# Altium PCB STM32-geiger.PcbDoc
Units mm, origin at the board's own origin, x right, y up, seen from the top; angles counter-clockwise.
Board outline 90 x 70 mm, 2 copper layers (Top Layer, Bottom Layer); 119 components, 85 nets, 345 pads, 48 vias.
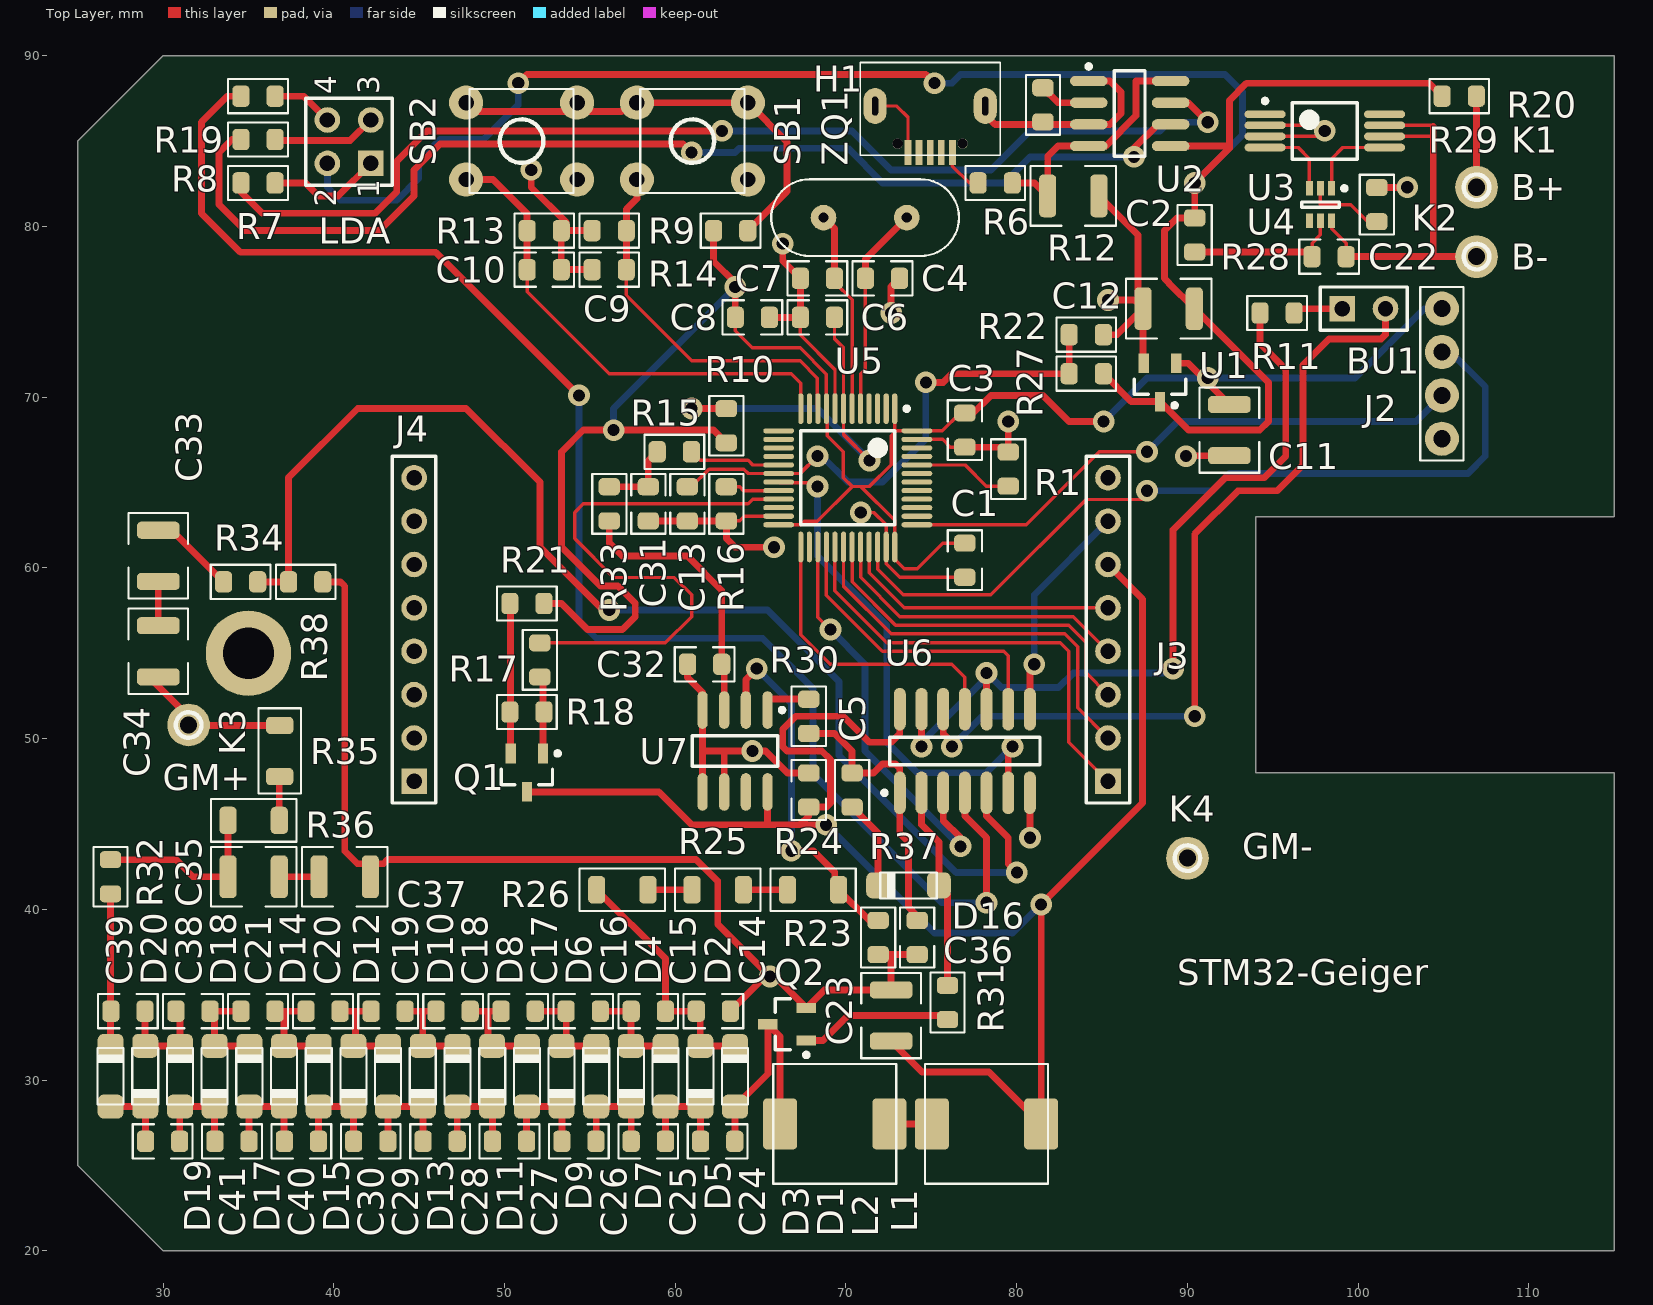
[diagram p0: Top Layer view]
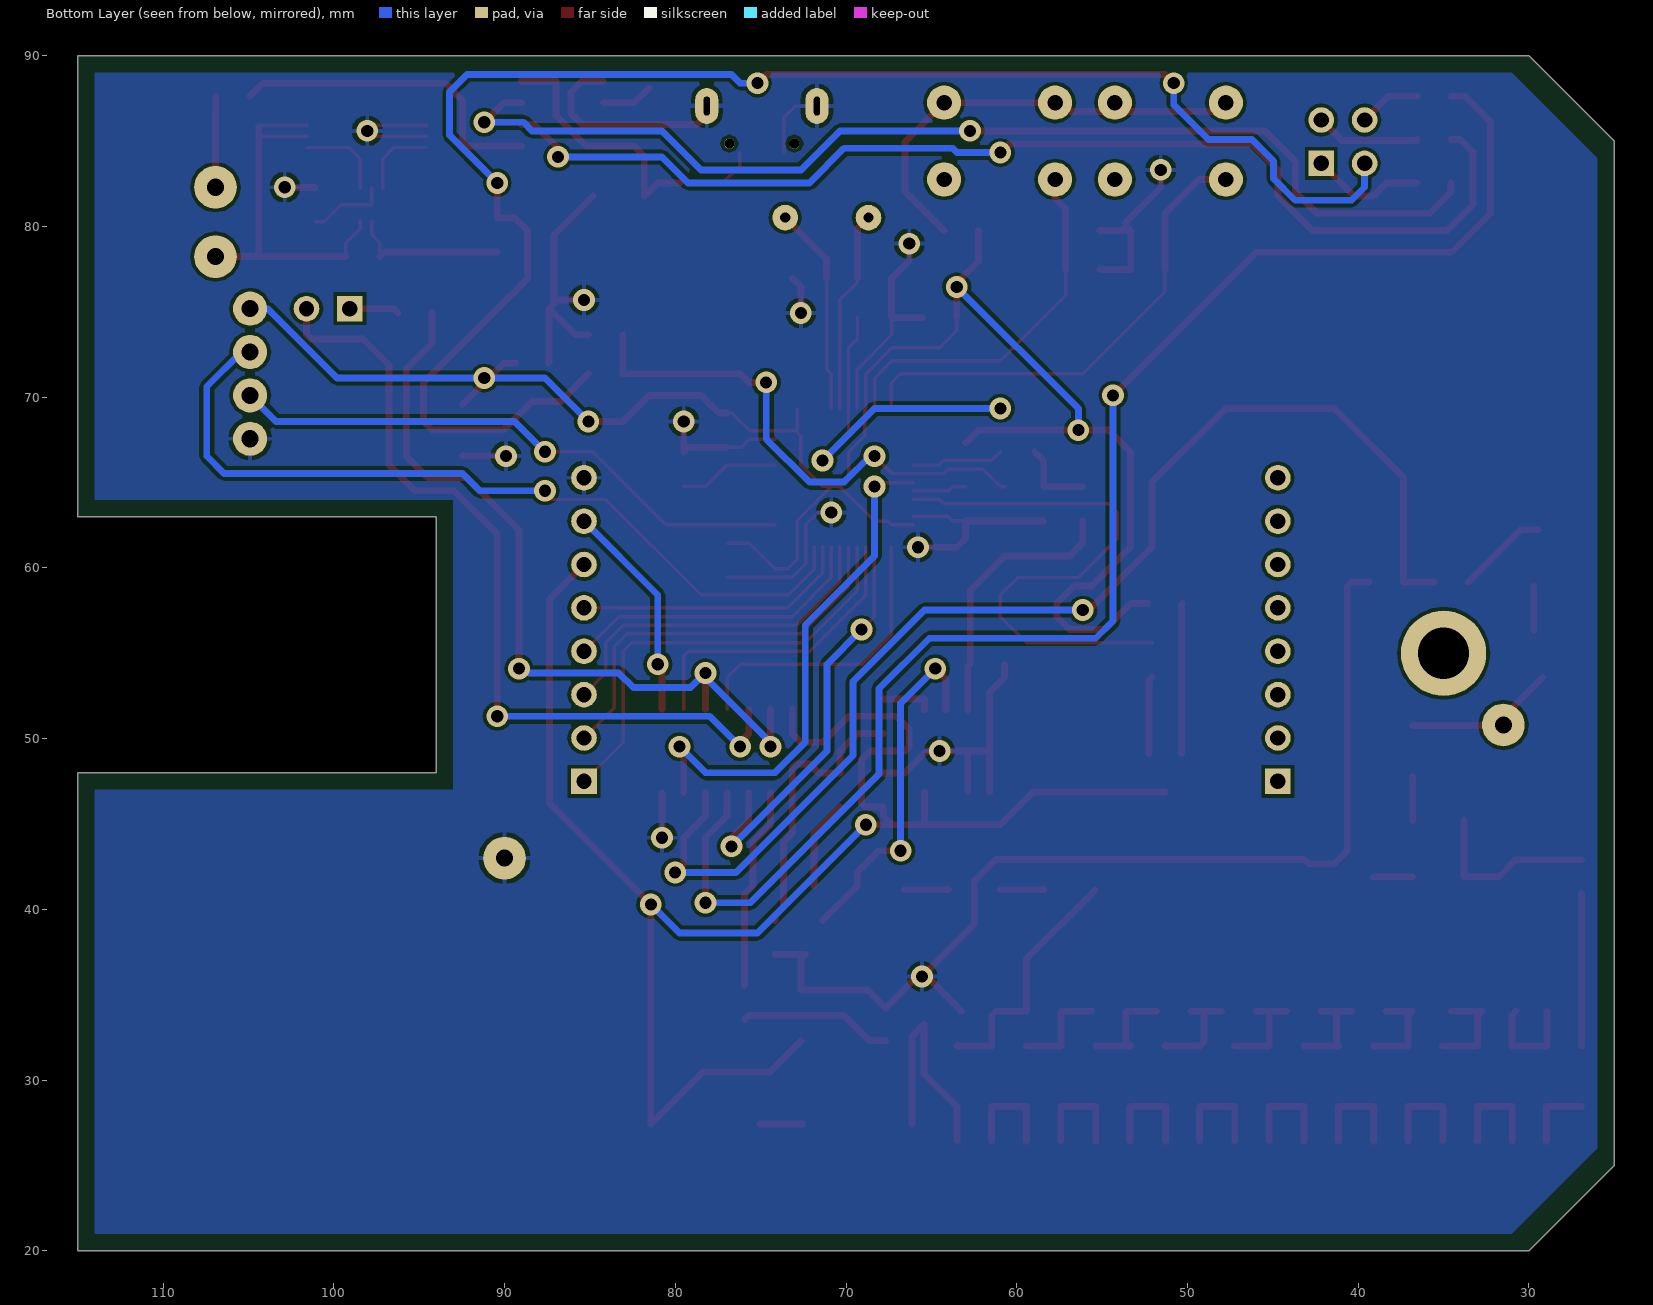
[diagram p1: Bottom Layer view, seen from below]
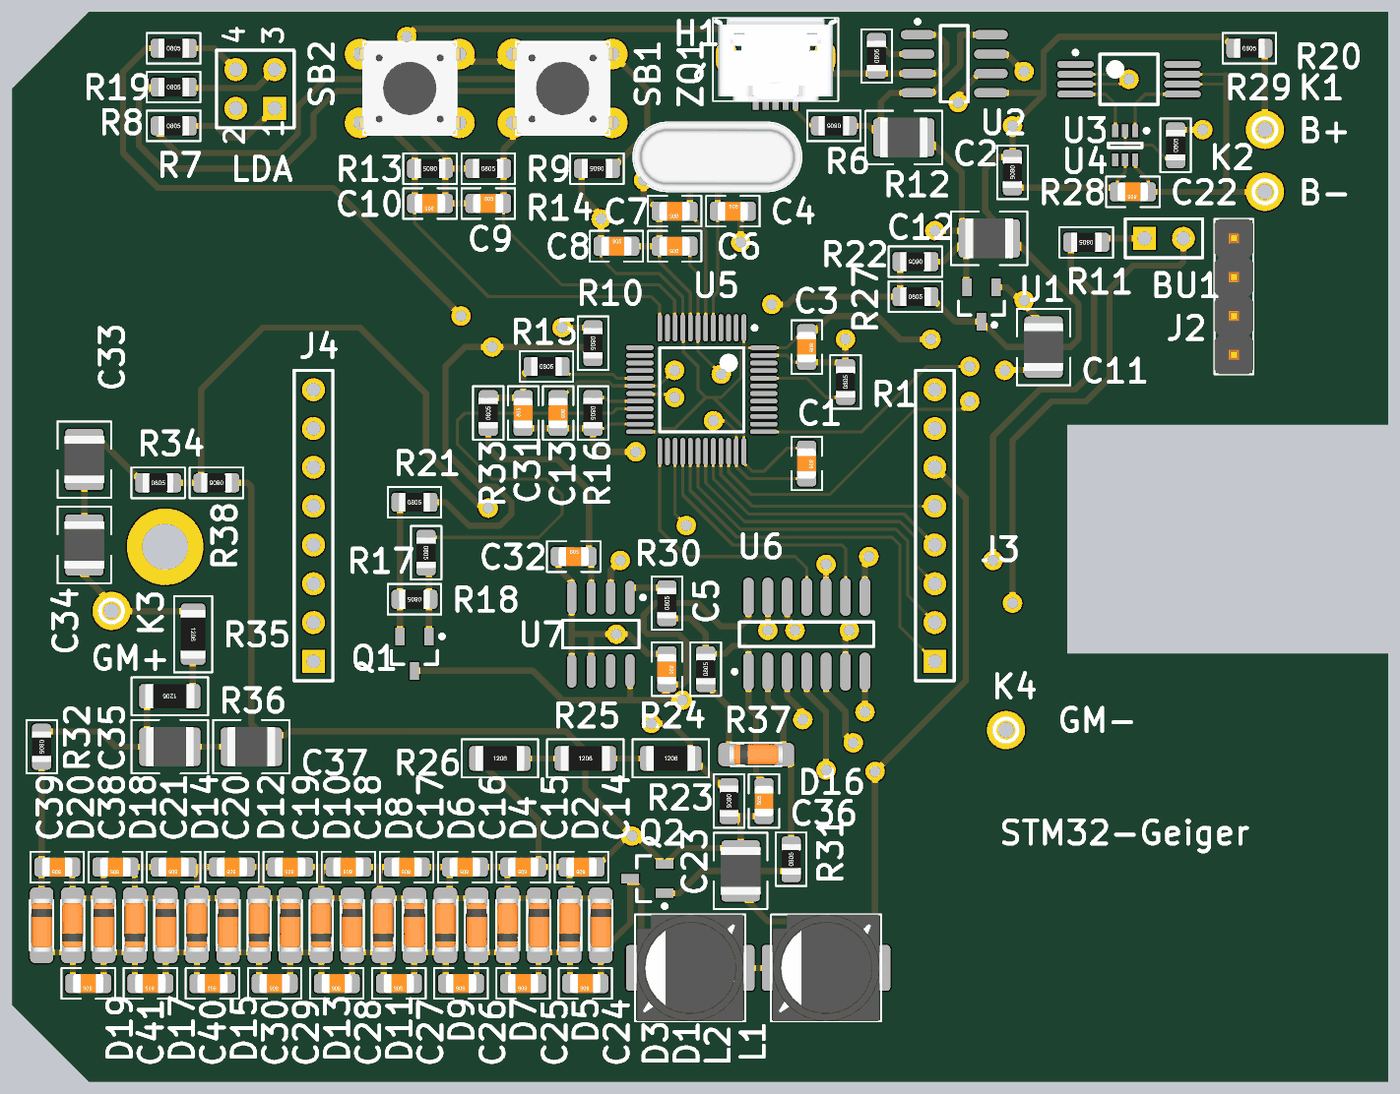
[diagram p2: 3D render of the assembled board from above, using the file's embedded part models]

## Layer stack, top to bottom
Top Solder: solder mask 0.0102, Solder Resist, Dk 3.5
Top Layer: signal copper 0.0356
Dielectric 1: dielectric 0.32, FR-4, Dk 4.8
Bottom Layer: signal copper 0.0356
Bottom Solder: solder mask 0.0102, Solder Resist, Dk 3.5

## Board outline
30,20 25,25 25,85 30,90 115,90 115,63 94,63 94,48 115,48 115,20 30,20

## Design rules (kind name [scope] priority, off if disabled: settings)
Clearance [All] p1: gap=0.2
PolygonConnect [All] p1: connectstyle=Relief reliefconductorwidth=0.254 reliefentries=4 polygonreliefangle="90 Angle" airgapwidth=0.254
RoutingVias [All] p1: holewidth=0.711 width=1.27 viastyle="Through Hole" minholewidth=0.711 minwidth=1.27 maxholewidth=0.711 maxwidth=1.27
SolderMaskExpansion [All] p1: expansion=0.102
Width [All] p1: maxlimit=1 minlimit=0.18 preferedwidth=0.4
30 further rules are at their usual default settings.

## Components (designator, comment, footprint, x,y, rotation, side; value= is the part's Value field where it differs from the comment)
BU1 "piezo" HDR1X2 99.06,75.184 r0 top
C1 "100n" C0805(2013) 76.962,60.452 r270 top
C2 "10u" C1210(3225) 83.312,81.788 r0 top
C3 "1.0" C0805(2013) 76.962,68.072 r270 top
C4 "15" C0805(2013) 72.136,76.962 r0 top
C5 "100n" C0805(2013) 67.818,46.99 r270 top
C6 "100n" C0805(2013) 68.326,74.676 r180 top
C7 "15" C0805(2013) 68.326,76.962 r180 top
C8 "100n" C0805(2013) 64.516,74.676 r0 top
C9 "100n" C0805(2013) 56.134,77.47 r0 top
C10 "100n" C0805(2013) 52.324,77.47 r180 top
C11 "10u" C1210(3225) 92.456,68.072 r270 top
C12 "10u" C1210(3225) 88.9,75.184 r180 top
C13 "1.0" C0805(2013) 60.706,63.754 r270 top
C14 "100n" C0805(2013) 62.23,34.036 r180 top
C15 "100n" C0805(2013) 58.42,34.036 r180 top
C16 "100n" C0805(2013) 54.61,34.036 r180 top
C17 "100n" C0805(2013) 50.8,34.036 r180 top
C18 "100n" C0805(2013) 46.99,34.036 r180 top
C19 "100n" C0805(2013) 43.18,34.036 r180 top
C20 "100n" C0805(2013) 39.37,34.036 r180 top
C21 "100n" C0805(2013) 35.56,34.036 r180 top
C22 "100n" C0805(2013) 98.298,78.232 r180 top
C23 "10u" C1210(3225) 72.644,33.782 r90 top
C24 "100n" C0805(2013) 62.484,26.416 r180 top
C25 "100n" C0805(2013) 58.42,26.416 r180 top
C26 "100n" C0805(2013) 54.356,26.416 r180 top
C27 "100n" C0805(2013) 50.292,26.416 r180 top
C28 "100n" C0805(2013) 46.228,26.416 r180 top
C29 "100n" C0805(2013) 42.164,26.416 r180 top
C30 "100n" C0805(2013) 38.1,26.416 r180 top
C31 "1.0" C0805(2013) 58.42,63.754 r90 top
C32 "1.0" C0805(2013) 61.722,54.356 r0 top
C33 "22" C1210(3225) 29.718,60.706 r270 top
C34 "22" C1210(3225) 29.718,55.118 r270 top
C35 "10nF" C1210(3225) 35.306,41.91 r0 top
C36 "100" C0805(2013) 74.168,38.354 r90 top
C37 "10nF" C1210(3225) 40.64,41.91 r0 top
C38 "100n" C0805(2013) 31.75,34.036 r180 top
C39 "100n" C0805(2013) 27.94,34.036 r180 top
C40 "100n" C0805(2013) 34.036,26.416 r180 top
C41 "100n" C0805(2013) 29.972,26.416 r180 top
D1 "LL4148" SOD80/MLL34 63.5,30.226 r90 top
D2 "LL4148" SOD80/MLL34 61.468,30.226 r270 top
D3 "LL4148" SOD80/MLL34 59.436,30.226 r90 top
D4 "LL4148" SOD80/MLL34 57.404,30.226 r270 top
D5 "LL4148" SOD80/MLL34 55.372,30.226 r90 top
D6 "LL4148" SOD80/MLL34 53.34,30.226 r270 top
D7 "LL4148" SOD80/MLL34 51.308,30.226 r90 top
D8 "LL4148" SOD80/MLL34 49.276,30.226 r270 top
D9 "LL4148" SOD80/MLL34 47.244,30.226 r90 top
D10 "LL4148" SOD80/MLL34 45.212,30.226 r270 top
D11 "LL4148" SOD80/MLL34 43.18,30.226 r90 top
D12 "LL4148" SOD80/MLL34 41.148,30.226 r270 top
D13 "LL4148" SOD80/MLL34 39.116,30.226 r90 top
D14 "LL4148" SOD80/MLL34 37.084,30.226 r270 top
D15 "LL4148" SOD80/MLL34 35.052,30.226 r90 top
D16 "LL4148" SOD80/MLL34 73.66,41.402 r180 top
D17 "LL4148" SOD80/MLL34 33.02,30.226 r270 top
D18 "LL4148" SOD80/MLL34 30.988,30.226 r90 top
D19 "LL4148" SOD80/MLL34 28.956,30.226 r270 top
D20 "LL4148" SOD80/MLL34 26.924,30.226 r90 top
H1 "USB Micro" "USB Micro" 74.93,84.328 r0 top
J2 "H-1x4" J1x4 104.902,71.374 r90 top
J3 "" HDR1X8 85.344,47.498 r90 top
J4 "" HDR1X8 44.704,47.498 r90 top
K1 "Battery +" F1-2.5 106.934,82.296 r0 top
K2 "Battery -" F1-2.5 106.934,78.232 r0 top
K3 "GM+" F1-2.5 31.496,50.8 r0 top
K4 "GM-" F1-2.5 90,43 r0 top
L1 "4.7uH" Dr-SD-75 78.232,27.432 r90 top
L2 "4.7uH" Dr-SD-75 69.342,27.432 r90 top
LDA "Header 2X2" HDR2X2 42.164,83.693 r90 top
Q1 "IRLML6402" Micro3_N 51.308,48.006 r270 top
Q2 "IRLML0100" SOT-23_N 66.548,33.274 r180 top
R1 "10k" R0805 79.502,65.786 r90 top
R6 "0.33 Ohm" R0805 78.74,82.55 r180 top
R7 "220" R0805 35.56,82.55 r0 top
R8 "220" R0805 35.56,85.09 r0 top
R9 "220" R0805 63.246,79.756 r180 top
R10 "10k" R0805 62.992,68.326 r270 top
R11 "220" R0805 95.25,74.93 r180 top
R12 "4.7k" R0805 81.534,87.122 r90 top
R13 "10k" R0805 52.324,79.756 r180 top
R14 "10k" R0805 56.134,79.756 r0 top
R15 "22k" R0805 59.944,66.802 r0 top
R16 "10k" R0805 62.992,63.754 r270 top
R17 "220" R0805 52.07,54.61 r270 top
R18 "91k" R0805 51.308,51.562 r180 top
R19 "220" R0805 35.56,87.63 r0 top
R20 "0" R0805 105.918,87.63 r0 top
R21 "10" R0805 51.308,57.912 r0 top
R22 "1M" R0805 84.074,73.66 r180 top
R23 "91k" R0805 71.882,38.354 r270 top
R24 "10M" R1206 68.072,41.148 r0 top
R25 "10M" R1206 62.484,41.148 r0 top
R26 "10M" R1206 56.896,41.148 r0 top
R27 "1M" R0805 84.074,71.374 r0 top
R28 "220" R0805 90.424,79.502 r270 top
R29 "1k" R0805 101.092,81.28 r90 top
R30 "47k" R0805 67.818,51.308 r90 top
R31 "10" R0805 75.946,34.544 r90 top
R32 "91k" R0805 26.924,41.91 r270 top
R33 "22k" R0805 56.134,63.754 r90 top
R34 "91k" R0805 34.544,59.182 r0 top
R35 "2.2M" R1206 36.83,49.276 r270 top
R36 "2.2M" R1206 35.306,45.212 r180 top
R37 "10k" R0805 70.358,46.99 r90 top
R38 "1M" R0805 38.354,59.182 r180 top
SB1 "Backlight/Ticks" TS-06 51,85 r270 top
SB2 "Power/Reset" TS-06 61,85 r270 top
U1 "XC6206P332" SOT23_N 88.392,70.866 r270 top
U2 "TP4056" 751-06_N 86.614,86.614 r0 top
U3 "FS8205A" SOP65P780-8M 98.044,85.598 r0 top
U4 "DW01A" SOT363-6N 97.79,81.28 r270 top
U5 "STM32F103C8T6TR" STM-LQFP48_N 70.104,65.278 r270 top
U6 "MC74HC14AD" 751A-02_M 76.962,49.276 r90 top
U7 "LM393D" 751-02_N 63.5,49.276 r270 top
ZQ1 "8MHz" HC49S 71.12,80.518 r0 top

## Footprints (in the part's own frame and the unit in brackets; to place one, negate y for a bottom-side part, rotate by r counter-clockwise, add the part's x,y. Pads: shape width x height; smd on the part's side, far side on the other; paste and mask are expansions set on the pad)
751-02_N [mm] "SOIC, 8-Leads, Body 4.9x3.9mm, Pitch 1.27mm, IPC Medium Density"
  oval 2.2x0.6 smd: 1(-2.4,1.905) 2(-2.4,0.635) 3(-2.4,-0.635) 4(-2.4,-1.905) 5(2.4,-1.905) 6(2.4,-0.635) 7(2.4,0.635) 8(2.4,1.905)
  silkscreen extent -2.52,-2.5 0.9,2.88, body extent -1.95,-2.45 1.95,2.45, height 1.75
751-06_N [mm] "SOIC, 8-Leads, Body 4.9x3.9mm, Pitch 1.27mm, IPC Medium Density"
  oval 2.2x0.6 smd: 1(-2.4,1.905) 2(-2.4,0.635) 3(-2.4,-0.635) 4(-2.4,-1.905) 5(2.4,-1.905) 6(2.4,-0.635) 7(2.4,0.635) 8(2.4,1.905)
  silkscreen extent -2.52,-2.5 0.9,2.88, body extent -1.95,-2.45 1.95,2.45, height 1.75
751A-02_M [mm] "SOIC, 14-Leads, Body 8.7x3.9mm, Pitch 1.27mm, IPC Low Density"
  oval 2.5x0.7 smd: 1(-2.45,3.81) 2(-2.45,2.54) 3(-2.45,1.27) 4(-2.45,0) 5(-2.45,-1.27) 6(-2.45,-2.54) 7(-2.45,-3.81) 8(2.45,-3.81) 9(2.45,-2.54) 10(2.45,-1.27) 11(2.45,0) 12(2.45,1.27) 13(2.45,2.54) 14(2.45,3.81)
  silkscreen extent -2.57,-4.4 0.8,4.83, body extent -2,-4.38 2,4.38, height 1.75
C0805(2013) [mm]
  rrect50% 1x1.25 smd: 1(-1,0) 2(1,0)
  silkscreen extent -1.75,-1 1.75,1, body extent -1,-0.62 1,0.63, height 0.73
C1210(3225) [mm]
  rrect50% 1x2.5 smd: 1(-1.5,0) 2(1.5,0)
  silkscreen extent -2.5,-1.75 2.5,1.75, body extent -1.55,-1.3 1.55,1.3, height 0.47
Dr-SD-75 [mm] "7.3x7.3x5mm"
  rrect25% 3x2 smd: 1(0,-3.2) 2(0,3.2)
  silkscreen extent -3.5,-3.6 3.5,3.6, body extent -3.5,-3.6 3.5,3.6, height 4.51
F1-2.5 [mm]
  round 2.5 hole 1: 1(0,0)
  silkscreen extent -0.75,-0.75 0.75,0.75
HC49S [mm]
  round 1.5 hole 0.6: 1(-2.44,0) 2(2.44,0)
  silkscreen extent -5.5,-2.25 5.5,2.25, body extent -5.5,-2.25 5.5,2.25, height 3.7
HDR1X2 [mm] "Connector; Header; 2 Position"
  rect 1.5x1.5 hole 0.9: 1(0,0)
  round 1.5 hole 0.9: 2(2.54,0)
  silkscreen extent -1.27,-1.27 3.81,1.27
HDR1X8 [mm] "Connector; Header; 8 Position"
  rect 1.5x1.5 hole 0.9: 1(0,0)
  round 1.5 hole 0.9: 2(2.54,0) 3(5.08,0) 4(7.62,0) 5(10.16,0) 6(12.7,0) 7(15.24,0) 8(17.78,0)
  silkscreen extent -1.27,-1.27 19.05,1.27
HDR2X2 [mm] "Connector; Header; 2x2 Position"
  rect 1.5x1.5 hole 0.9: 1(0,0)
  round 1.5 hole 0.9: 2(0,2.54) 3(2.54,0) 4(2.54,2.54)
  silkscreen extent -1.27,-1.27 3.81,3.81
J1x4 [mm]
  round 2 hole 1: 1(-3.81,0) 2(-1.27,0) 3(1.27,0) 4(3.81,0)
  silkscreen extent -5.08,-1.27 5.08,1.27, body extent -5.08,-1.27 5.08,1.27, height 10.1
Micro3_N [mm] "SOT23, 3-Leads, Body 2.9x1.3mm, Pitch 0.95mm, Lead Span 2.3mm, IPC Medium Density"
  rect 1.15x0.6 smd: 1(-1.125,0.95) 2(-1.125,-0.95) 3(1.125,0)
  silkscreen extent -1.25,-1.5 0.7,1.93, body extent -0.7,-1.5 0.7,1.5, height 1.12
R0805 [mm]
  rrect50% 1x1.25 smd: 1(-1,0) 2(1,0)
  silkscreen extent -1.75,-1 1.75,1, body extent -1,-0.62 1,0.63, height 0.6
R1206 [mm]
  rrect50% 1x1.6 smd: 1(-1.5,0) 2(1.5,0)
  silkscreen extent -2.5,-1.25 2.5,1.25, body extent -1.6,-0.8 1.6,0.8, height 0.6
SOD80/MLL34 [mil]
  rrect50% 55x60 smd: 1(-70,0) 2(70,0)
  silkscreen extent -65,-30 65,30, body extent -69,-28 69,27, height 55
SOP65P780-8M [mm] "SOP, 8-Leads, Body 3x5.3mm, Pitch 0.65mm, IPC Low Density"
  oval 2.4x0.45 smd: 1(-3.5,0.975) 2(-3.5,0.325) 3(-3.5,-0.325) 4(-3.5,-0.975) 5(3.5,-0.975) 6(3.5,-0.325) 7(3.5,0.325) 8(3.5,0.975)
  silkscreen extent -3.62,-1.65 1.9,1.87, body extent -2.8,-1.65 2.8,1.65, height 2
SOT23_N [mm] "SOT23, 3-Leads, Body 2.9x1.3mm, Pitch 0.95mm, Lead Span 2.3mm - Reverse Pinning, IPC Medium Density"
  rect 1.15x0.6 smd: 1(1.125,0) 2(-1.125,-0.95) 3(-1.125,0.95)
  silkscreen extent -0.2,-1.5 1.47,1.5, body extent -0.7,-1.5 0.7,1.5, height 1.1
SOT363-6N [mm] "SOT363, 6-Leads, Body 2x1.3mm, Pitch 0.65mm, Lead Span 2.1mm, IPC Medium Density"
  rect 0.85x0.4 smd: 1(-0.95,0.65) 2(-0.95,0) 3(-0.95,-0.65) 4(0.95,-0.65) 5(0.95,0) 6(0.95,0.65)
  silkscreen extent -1.07,-1.1 0.15,1.53, body extent -0.7,-1.1 0.7,1.1, height 1
SOT-23_N [mm] "SOT23, 3-Leads, Body 2.9x1.3mm, Pitch 0.95mm, Lead Span 2.3mm, IPC Medium Density"
  rect 1.15x0.6 smd: 1(-1.125,0.95) 2(-1.125,-0.95) 3(1.125,0)
  silkscreen extent -1.25,-1.5 0.7,1.92, body extent -0.7,-1.5 0.7,1.5, height 1.11
STM-LQFP48_N [mm] "QFP, 48-Leads, Body 7x7mm, Pitch 0.5mm, IPC Medium Density"
  oval 1.8x0.3 smd: 1(-4.05,2.75) 2(-4.05,2.25) 3(-4.05,1.75) 4(-4.05,1.25) 5(-4.05,0.75) 6(-4.05,0.25) 7(-4.05,-0.25) 8(-4.05,-0.75) 9(-4.05,-1.25) 10(-4.05,-1.75) 11(-4.05,-2.25) 12(-4.05,-2.75) 25(4.05,-2.75) 26(4.05,-2.25) 27(4.05,-1.75) 28(4.05,-1.25) 29(4.05,-0.75) 30(4.05,-0.25) 31(4.05,0.25) 32(4.05,0.75) 33(4.05,1.25) 34(4.05,1.75) 35(4.05,2.25) 36(4.05,2.75)
  oval 0.3x1.8 smd: 13(-2.75,-4.05) 14(-2.25,-4.05) 15(-1.75,-4.05) 16(-1.25,-4.05) 17(-0.75,-4.05) 18(-0.25,-4.05) 19(0.25,-4.05) 20(0.75,-4.05) 21(1.25,-4.05) 22(1.75,-4.05) 23(2.25,-4.05) 24(2.75,-4.05) 37(2.75,4.05) 38(2.25,4.05) 39(1.75,4.05) 40(1.25,4.05) 41(0.75,4.05) 42(0.25,4.05) 43(-0.25,4.05) 44(-0.75,4.05) 45(-1.25,4.05) 46(-1.75,4.05) 47(-2.25,4.05) 48(-2.75,4.05)
  silkscreen extent -4.17,-2.75 2.75,3.58, body extent -3.5,-3.5 3.5,3.5, height 1.6
TS-06 [mm]
  round 2 hole 0.9: 1(-2.25,3.25) 1(-2.25,-3.25) 2(2.25,3.25) 2(2.25,-3.25)
  silkscreen extent -3.05,-3.05 3.05,3.05, body extent -3,-3.3 3,3.3, height 3.95
"USB Micro" [mm]
  rrect100% 1.35x2.1 hole 0.35 slot 1.1 at 90 deg: 0(-3.225,2.725) 0(3.225,2.725)
  rect 0.4x1.45 smd: 1(1.3,0) 2(0.65,0) 3(0,0) 4(-0.65,0) 5(-1.3,0)
  round 0.6 hole 0.6 unplated: A(-1.9,0.525) A(1.9,0.525)
  silkscreen extent -4.1,-0.15 4.1,5.28, body extent -4.1,-0.15 4.1,5.28, height 2.68

## Part data
BU1: library part "Header 2", "Header, 2-Pin"
C1 C3 C4 C5 C6 C7 C8 C9 C10 C13 C14 C15 C16 C17 C18 C19 C20 C21 C22 C24 C25 C26 C27 C28 C29 C30 C31 C32 C36 C38 C39 C40 C41: library part C-0805, "SMD-0805"
C2 C11 C12 C23 C33 C34 C35 C37: library part "C-1210  100V 2.2u", "SMD-1210 100V X7R 10%"
D1 D2 D3 D4 D5 D6 D7 D8 D9 D10 D11 D12 D13 D14 D15 D16 D17 D18 D19 D20: "75V 0.3A SOD80/MLL34"
H1: "USB B Micro R/A SMD"
J3 J4: library part "Header 8", "Header, 8-Pin"
K1 K2 K3 K4: library part K-1-2.5
L1 L2: library part "L-SD-75 33uH", "1.2A 0.15om 7.3x7.3x5mm"
LDA: "Header, 2-Pin, Dual row"
Q1: library part IRLML6401, "HEXFET Power MOSFET"
Q2: library part IRLML2402, "HEXFET Power MOSFET"
R1 R6 R7 R8 R9 R10 R11 R12 R13 R14 R15 R16 R17 R18 R19 R20 R21 R22 R23 R27 R28 R29 R30 R31 R32 R33 R34 R37 R38: library part R-0805, "SMD 0805 0.1W 5% 150V"
R24 R25 R26 R35 R36: library part R-1206, "SMD 1206 0.125W 5% 200V"
SB1 SB2: library part "Buton TS-06"
U1: library part "Volt Reg", "Voltage Regulator"
U2 U3: library part MP2307
U4: library part "Header 6", "Header, 6-Pin"
U5: "ARM Cortex-M3 32-bit MCU, 64 KB Flash, 20 KB Internal RAM, 37 I/Os, 48-pin LQFP, -40 to 85 degC, Tape and Reel"
U6: "Hex Schmitt Trigger Inverter"
U7: "Dual Comparator"
ZQ1: library part Q

## Free pads (board coordinates)
  round 5 hole 3: 0(35,55)

## Via types
v1: diameter 1.27, hole 0.711, Top Layer to Bottom Layer, 48 vias

## Nets (pads, with @x,y where several pads share a name; then routed paths per layer and width w, separated by ;. In a path a pad name is that pad's centre, name@x,y a point inside that pad or via, vN(x,y) a via of type N, cw(c..) or ccw(c..) an arc to the next point about the centre after c; other vN are vias at no path point)
GND: C1.2 C2.2 C3.2 C4.2 C5.1 C6.2 C7.2 C8.2 C9.1 C10.1 C11.2 C12.2 C13.2 C14.1 C23.2 C31.1 C32.1 C36.1 C37.2 H1.0 H1.5 J2.1 J3.8 K4.1 Q2.2 R1.2 R12.1 R13.1 R14.1 R16.2 R22.1 R23.2 R29.2 R38.1 U1.2 U2.1 U2.3 U3.2 U3.3 U5.8 U5.23 U5.35 U5.47 U6.7 U7.4 U7.5 U7.6 | length 179.6
  Top Layer w0.2: R16.2 63.77,62.754 64.044,63.028 U5.23 ; C6.2 67.326,73.644 69.354,71.616 U5.8 ; v1(70.866,63.246) 71.628,63.246 72.354,62.52 U5.35 72.354,60.234 73.136,59.452 C1.2 ; H1.0@71.705,87.053 72.967,87.053 73.63,86.39 H1.5 ; U5.47 75.656,67.528 76.112,67.072 C3.2 ; U3.3 97.719,85.273 v1(98.044,85.598) 97.719,85.923 U3.2
  Top Layer w0.4: R38.1 40.386,59.182 40.64,58.928 40.64,43.41 41.378,42.672 42.902,42.672 43.156,42.926 61.214,42.926 62.484,41.656 62.484,39.13 v1(65.546,36.068) ; v1(51.562,83.312) 51.562,82.296 53.594,80.264 53.594,80.026 R13.1 ; C9.1 C10.1 R13.1 ; R14.1 R13.1 ; C31.1 C13.2 ; C32.1 60.722,53.578 61.595,52.705 U7.4 61.595,49.276 ; C13.2@60.722,62.738 C13.2 ; U7.5 61.595,49.276 ; U7.6 62.865,49.149 62.738,49.276 ; C14.1 65.262,36.068 65.829,36.068 Q2.2 68.731,35.282 C23.2 72.644,37.084 72.374,37.354 C36.1 ; C8.2 C6.2 C7.2 66.294,77.994 v1(66.294,78.994) ; v1(65.786,61.214) 63.5,61.214 62.992,61.722 R16.2 C13.2 ; C5.1 66.564,47.99 65.278,49.276 v1(64.516,49.276) 62.738,49.276 ; v1(72.644,74.93) 72.644,76.47 C4.2 ; C3.2 79.216,67.072 R1.2@79.486,66.802 ; H1.0@78.409,86.291 78.74,85.96 78.74,85.979 U2.3 85.471,85.979 86.106,86.614 86.106,87.884 85.471,88.519 U2.1 ; R1.2 v1(79.502,68.58) ; v1(80.772,44.196) U6.7 U6.7@80.772,45.72 ; C2.2 87.106,79.494 C12.2@87.106,75.478 ; R22.1 85.876,73.66 C12.2 ; v1(85.344,75.692) 86.892,75.692 C12.2@87.106,75.478 ; U1.2 87.4,72.033 C12.2 ; K4.1@89.916,42.916 K4.1 ; v1@89.94,66.572 C11.2 ; R29.2 102.854,82.28 v1(102.87,82.296) ; 61.595,49.276 62.738,49.276 ; C12.2@87.106,75.478 C12.2
  other v1: 89.916,66.548
NetBU1_1: BU1.1 R11.1 | length 2.9
  Top Layer w0.4: R11.1 96.504,75.184 BU1.1
NetBU1_2: BU1.2 U6.12 | length 49
  Top Layer w0.4: U6.12 75.692,50.292 76.2,49.784 v1(76.2,49.53) ; v1(90.424,51.308) 90.424,61.976 92.964,64.516 95.25,64.516 96.774,66.04 96.774,71.882 98.298,73.406 101.346,73.406 101.6,73.66 BU1.2
  Bottom Layer w0.4: v1(76.2,49.53) 77.978,51.308 v1(90.424,51.308)
NetC1_1: C1.1 C3.1 C8.1 C11.1 J2.4 R9.2 R10.2 R21.2 U1.3 U5.1 U5.9 U5.24 U5.36 U5.48 | length 122.5
  Top Layer w0.2: C8.1 63.516,73.898 64.516,72.898 67.31,72.898 68.854,71.354 U5.9 68.904,69.278 68.904,67.748 69.85,66.802 69.85,65.278 70.358,64.77 ; U5.24 67.354,62.528 67.564,62.738 68.326,62.738 70.358,64.77 ; U5.1 72.854,68.116 72.942,68.028 ; C1.1 75.676,61.452 74.168,59.944 73.406,59.944 72.854,60.496 U5.36 72.854,62.782 70.866,64.77 70.358,64.77 ; C3.1 76.692,69.072 75.648,68.028 U5.48 72.942,68.028 ; 70.358,64.77 71.374,64.77 72.644,66.04 72.644,67.73 72.942,68.028
  Top Layer w0.4: R21.2 53.34,57.912 54.864,56.388 56.896,56.388 57.658,57.15 57.658,57.912 56.634,58.936 55.618,58.936 53.34,61.214 53.34,66.802 54.61,68.072 v1(56.388,68.072) 62.246,68.072 R10.2 ; R9.2 62.246,77.962 63.516,76.692 v1(63.516,76.454) C8.1 ; C3.1 77.454,69.072 78.486,70.104 81.534,70.104 83.058,68.58 v1(85.09,68.58) ; U1.3 90.037,71.991 C11.1
  Bottom Layer w0.4: v1(56.388,68.072) 56.388,69.326 v1(63.516,76.454) ; v1(85.09,68.58) 87.63,71.12 v1(91.186,71.12) 99.822,71.12 103.886,75.184 J2.4
NetC2_1: C2.1 R6.1 U2.4 U2.8 | length 14.9
  Top Layer w0.4: R6.1 81.05,82.55 C2.1 81.812,84.098 82.423,84.709 U2.4 85.217,84.709 86.995,86.487 86.995,88.519 U2.8
NetC4_1: C4.1 U5.5 ZQ1.2 | length 12.3
  Top Layer w0.2: U5.5 70.854,71.362 71.136,71.644 C4.1
  Top Layer w0.4: C4.1 71.136,78.094 ZQ1.2
NetC5_2: C5.2 C23.1 J3.6 L1.1 Q1.3 U6.14 U7.8 | length 105.1
  Top Layer w0.4: Q1.3 59.037,46.881 60.96,44.958 v1(68.834,44.958) 65.532,44.958 65.405,45.085 U7.8 ; 67.31,44.958 67.818,45.466 C5.2 68.85,45.99 69.088,46.228 69.088,48.768 68.58,49.276 66.548,49.276 66.294,49.53 66.294,50.546 67.056,51.308 69.85,51.308 71.374,49.784 72.644,49.784 73.152,50.292 U6.14 ; C23.1 74.446,30.48 78.384,30.48 L1.1 v1(81.432,40.284) 87.376,46.228 87.376,58.166 J3.6
  Bottom Layer w0.4: v1(68.834,44.958) 75.184,38.608 79.756,38.608 v1(81.432,40.284)
NetC6_1: C6.1 R10.1 U5.7 | length 22.9
  Top Layer w0.2: C6.1 69.326,73.422 69.854,72.894 U5.7 69.854,67.814 v1(71.374,66.294)
  Top Layer w0.4: v1(60.96,69.342) R10.1@62.976,69.342
  Bottom Layer w0.4: v1(60.96,69.342) 68.326,69.342 v1(71.374,66.294)
NetC7_1: C7.1 U5.6 ZQ1.1 | length 11.9
  Top Layer w0.2: C7.1 69.326,76.724 70.354,75.696 U5.6
  Top Layer w0.4: ZQ1.1 69.326,79.872 C7.1
NetC9_2: C9.2 R14.2 SB2.2 U5.10 | length 22
  Top Layer w0.2: C9.2 57.134,75.962 60.96,72.136 67.31,72.136 68.326,71.12 68.326,69.356 U5.10
  Top Layer w0.4: C9.2 R14.2 57.134,81.01 57.75,81.626 SB2.2@57.75,82.75
NetC10_2: C10.2 R13.2 SB1.2 U5.12 | length 28.7
  Top Layer w0.2: C10.2 51.324,76.184 56.134,71.374 66.802,71.374 67.354,70.822 U5.12
  Top Layer w0.4: SB1.2@47.75,82.75 49.33,82.75 51.324,80.756 R13.2 C10.2
NetC12_1: C12.1 LDA.2 R20.1 R27.2 R28.1 U1.1 U2.5 | length 118.6
  Top Layer w0.4: v1(50.8,88.392) 51.308,88.9 74.676,88.9 v1(75.184,88.392) ; R27.2 86.707,69.741 U1.1 90.061,68.072 94.234,68.072 94.742,68.58 94.742,70.866 90.424,75.184 C12.1 88.9,76.684 88.9,76.708 88.646,76.962 88.646,79.756 89.392,80.502 R28.1 v1(90.424,82.55) 92.456,84.582 ; U2.5 92.329,84.709 92.456,84.582 ; 92.456,84.709 92.456,84.582 ; R20.1 104.156,88.392 93.472,88.392 92.456,87.376 92.456,84.582
  Bottom Layer w0.4: LDA.2 39.624,82.296 40.386,81.534 43.688,81.534 44.958,82.804 44.958,83.82 46.228,85.09 48.768,85.09 50.8,87.122 v1(50.8,88.392) ; v1(75.184,88.392) 76.2,88.392 76.708,88.9 92.202,88.9 93.218,87.884 93.218,85.344 v1(90.424,82.55)
NetC13_1: C13.1 R22.2 R27.1 U5.18 | length 30.8
  Top Layer w0.2: C13.1 60.944,64.754 61.976,65.786 64.008,65.786 64.266,65.528 U5.18 67.306,65.528 v1(68.326,66.548)
  Top Layer w0.4: v1(74.676,70.866) 75.692,70.866 76.2,71.374 R27.1 R22.2
  Bottom Layer w0.4: v1(68.326,66.548) 68.58,66.548 70.104,65.024 72.136,65.024 74.676,67.564 v1(74.676,70.866)
NetC14_2: C14.2 C15.1 D1.2 D2.1 R26.1 | length 14.4
  Top Layer w0.4: R26.1 59.42,37.124 C15.1 C14.2 ; C14.2@61.468,33.798 D2.1 D1.2
NetC15_2: C15.2 C16.1 D3.2 D4.1 | length 5.8
  Top Layer w0.4: C16.1 57.388,34.036 57.404,34.02 D4.1 D3.2
NetC16_2: C16.2 C17.1 D5.2 D6.1 | length 6
  Top Layer w0.4: C17.1 C16.2 53.61,32.274 D6.1 D5.2
NetC17_2: C17.2 C18.1 D7.2 D8.1 | length 6
  Top Layer w0.4: C18.1 49.022,34.036 ; C17.2 49.022,34.036 ; D7.2 D8.1 49.022,32.258 49.022,34.036
NetC18_2: C18.2 C19.1 D9.2 D10.1 | length 5.9
  Top Layer w0.4: C19.1 45.212,34.036 ; C18.2 45.212,34.036 ; D9.2 D10.1 45.212,34.036
NetC19_2: C19.2 C20.1 D11.2 D12.1 | length 5.9
  Top Layer w0.4: C20.1 41.275,34.036 ; C19.2 41.275,34.036 ; D11.2 D12.1 41.275,32.131 41.275,34.036
NetC20_2: C20.2 C21.1 D13.2 D14.1 | length 5.7
  Top Layer w0.4: C20.2 36.83,34.036 37.084,33.782 D14.1 D13.2
NetC21_2: C21.2 C38.1 D15.2 D17.1 | length 6
  Top Layer w0.4: C21.2 C38.1 33.02,33.766 D17.1 D15.2
NetC22_1: C22.1 K2.1 U3.6 U3.7 U4.6 | length 25.5
  Top Layer w0.2: U4.6 98.44,79.868 99.298,79.01 C22.1 ; U3.6 104.323,85.273 104.394,85.344 ; U3.7 104.323,85.923 104.394,85.852
  Top Layer w0.4: C22.1 104.394,78.232 ; 104.394,85.852 104.394,85.344 104.394,78.232 ; K2.1 107.95,78.232 104.394,78.232
NetC22_2: C22.2 R28.2 U4.5 | length 9.3
  Top Layer w0.2: C22.2 97.298,79.01 97.79,79.502 U4.5
  Top Layer w0.4: R28.2 97.028,78.502 C22.2
NetC24_1: C24.1 D1.1 L2.2 Q2.3 | length 13.8
  Top Layer w0.4: C24.1 63.5,26.432 D1.1 65.423,30.371 Q2.3 66.142,32.555 L2.2
NetC24_2: C24.2 C25.1 D2.2 D3.1 | length 6.1
  Top Layer w0.4: C25.1 59.42,28.432 D3.1 D2.2 61.484,28.432 C24.2
NetC25_2: C25.2 C26.1 D4.2 D5.1 | length 6.1
  Top Layer w0.4: C26.1 55.372,26.432 D5.1 D4.2 57.42,28.432 C25.2
NetC26_2: C26.2 C27.1 D6.2 D7.1 | length 6.1
  Top Layer w0.4: C27.1 51.292,28.432 D7.1 D6.2 53.356,28.432 C26.2
NetC27_2: C27.2 C28.1 D8.2 D9.1 | length 6.1
  Top Layer w0.4: C28.1 47.228,28.432 D9.1 D8.2 49.292,28.432 C27.2
NetC28_2: C28.2 C29.1 D10.2 D11.1 | length 6.1
  Top Layer w0.4: C29.1 43.18,26.432 D11.1 D10.2 45.228,28.432 C28.2
NetC29_2: C29.2 C30.1 D12.2 D13.1 | length 6.1
  Top Layer w0.4: C30.1 39.1,28.432 D13.1 D12.2 41.148,26.432 C29.2
NetC30_2: C30.2 C40.1 D14.2 D15.1 | length 6.1
  Top Layer w0.4: C40.1 35.036,28.432 D15.1 D14.2 37.084,26.432 C30.2
NetC31_2: C31.2 R15.1 R33.2 | length 4.6
  Top Layer w0.4: R33.2 C31.2 58.42,66.278 R15.1
NetC32_2: C32.2 R33.1 U7.3 | length 16.1
  Top Layer w0.4: R33.1 56.134,61.468 56.896,60.706 60.706,60.706 62.722,58.69 C32.2 62.865,54.213 U7.3
NetC33_1: C33.1 R34.1 | length 5.3
  Top Layer w0.4: C33.1@29.464,62.23 30.496,62.23 R34.1
NetC33_2: C33.2 C34.1 | length 2.6
  Top Layer w0.4: C34.1@29.718,56.34 C33.2@29.718,58.928
NetC34_2: C34.2 K3.1 R35.1 | length 10.9
  Top Layer w0.4: C34.2@29.21,53.594 32.234,50.57 31.266,50.57 K3.1 31.52,50.776 R35.1
NetC35_1: C35.1 R32.1 R36.2 | length 10.6
  Top Layer w0.4: R32.1 30.75,42.91 31.75,41.91 C35.1 R36.2
NetC35_2: C35.2 C37.1 | length 2.3
  Top Layer w0.4: C35.2 C37.1
NetC36_2: C36.2 R30.1 R37.2 U6.1 | length 16.7
  Top Layer w0.4: R30.1 69.326,50.308 70.358,49.276 R37.2 71.612,47.99 72.136,48.514 72.898,48.514 73.152,48.26 U6.1 73.152,44.45 73.66,43.942 73.66,40.132 74.168,39.624 C36.2
NetC38_2: C38.2 C39.1 D18.2 D19.1 | length 6.2
  Top Layer w0.4: C39.1 28.94,32.02 D19.1 D18.2 30.988,33.798 C38.2
NetC39_2: C39.2 D20.2 R32.2 | length 8.9
  Top Layer w0.4: D20.2 R32.2
NetC40_2: C40.2 C41.1 D17.2 D18.1 | length 6.1
  Top Layer w0.4: C41.1 30.972,28.432 D18.1 D17.2 33.02,26.432 C40.2
NetC41_2: C41.2 D19.2 D20.1 | length 4.1
  Top Layer w0.4: D20.1 D19.2 28.972,28.432 C41.2
NetD16_1: D16.1 R31.2 U6.2 | length 11.9
  Top Layer w0.4: U6.2 74.422,44.958 75.438,43.942 D16.1 75.946,40.894 R31.2
NetD16_2: D16.2 R37.1 | length 5.2
  Top Layer w0.4: R37.1 71.882,44.466 D16.2
NetH1_1: H1.1 R6.2 | length 2.7
  Top Layer w0.2: H1.1 76.23,83.536 77.216,82.55 R6.2
NetJ2_2: J2.2 U5.37 | length 34
  Top Layer w0.2: U5.37@74.204,62.578 U5.37 80.562,62.528 84.836,66.802 v1(87.63,66.802)
  Bottom Layer w0.4: v1(87.63,66.802) 89.408,68.58 103.378,68.58 J2.2
NetJ2_3: J2.3 U5.34 | length 48.5
  Top Layer w0.2: U5.34 71.854,59.914 73.348,58.42 78.486,58.42 84.074,64.008 87.376,64.008 87.63,64.262 v1(87.63,64.516)
  Bottom Layer w0.4: v1(87.63,64.516) 91.44,64.516 92.456,65.532 106.426,65.532 107.442,66.548 107.442,70.612 105.41,72.644 J2.3
NetJ3_1: J3.1 U5.29 | length 26.3
  Top Layer w0.2: U5.29 69.342,61.216 69.342,58.674 72.39,55.626 82.55,55.626 83.058,55.118 83.058,49.784 J3.1
NetJ3_2: J3.2 U5.30 | length 23.6
  Top Layer w0.2: U5.30 69.854,58.924 72.644,56.134 82.804,56.134 83.566,55.372 83.566,51.816 J3.2
NetJ3_3: J3.3 U5.31 | length 20.8
  Top Layer w0.2: U5.31 70.354,59.186 72.898,56.642 83.058,56.642 84.074,55.626 84.074,53.848 J3.3
NetJ3_4: J3.4 U5.32 | length 18.1
  Top Layer w0.2: U5.32 70.854,59.448 73.152,57.15 83.312,57.15 J3.4
NetJ3_5: J3.5 U5.33 | length 16.4
  Top Layer w0.2: U5.33 71.354,59.71 73.406,57.658 J3.5
NetJ3_7: J3.7 U6.8 | length 12.9
  Top Layer w0.4: U6.8 80.772,54.102 v1(81.026,54.356)
  Bottom Layer w0.4: v1(81.026,54.356) 81.026,58.42 J3.7
NetK1_1: K1.1 R20.2 | length 5.4
  Top Layer w0.4: R20.2 106.918,86.852 106.934,86.868 K1.1
NetL1_2: L1.2 L2.1 | length 2.5
  Top Layer w0.4: L2.1 L1.2
NetLDA_1: LDA.1 R7.2 | length 6.7
  Top Layer w0.4: R7.2 38.354,82.55 39.116,81.788 40.259,81.788 LDA.1
NetLDA_3: LDA.3 R8.2 | length 6.2
  Top Layer w0.4: R8.2 36.56,85.029 40.96,85.029 LDA.3
NetLDA_4: LDA.4 R19.2 | length 3.6
  Top Layer w0.4: R19.2 38.227,87.63 LDA.4
NetQ1_1: Q1.1 R17.2 R18.1 | length 4.6
  Top Layer w0.4: R17.2 52.258,53.422 Q1.1
NetQ1_2: Q1.2 R18.2 R21.1 | length 8.8
  Top Layer w0.4: R21.1 50.358,57.862 Q1.2
NetQ2_1: Q2.1 R31.1 | length 9
  Top Layer w0.4: Q2.1 68.646,32.324 70.104,33.782 75.708,33.782 R31.1
NetR1_1: R1.1 U5.44 | length 5.9
  Top Layer w0.2: U5.44 76.974,66.028 78.216,64.786 R1.1
NetR7_1: R7.1 U2.7 | length 65.7
  Top Layer w0.4: R7.1 34.56,82.026 35.814,80.772 42.418,80.772 43.688,82.042 43.688,83.82 45.466,85.598 v1(62.738,85.598) v1@62.738,85.344 ; U2.7 90.043,87.249 v1(91.186,86.106)
  Bottom Layer w0.4: v1(62.738,85.598) 70.358,85.598 72.644,83.312 78.486,83.312 80.772,85.598 88.392,85.598 88.9,86.106 v1(91.186,86.106)
NetR8_1: R8.1 U2.6 | length 66.9
  Top Layer w0.4: R8.1 34.036,85.09 33.274,84.328 33.274,81.28 34.798,79.756 42.672,79.756 44.704,81.788 44.704,83.312 46.228,84.836 60.452,84.836 v1(60.96,84.328) ; v1(86.868,84.074) 86.868,84.582 88.265,85.979 U2.6
  Bottom Layer w0.4: v1(60.96,84.328) 63.5,84.328 63.754,84.582 70.104,84.582 72.136,82.55 79.248,82.55 80.772,84.074 v1(86.868,84.074)
NetR9_1: R9.1 SB1.1 SB2.1 | length 25.9
  Top Layer w0.4: SB1.1@48.004,86.742 56.853,86.742 57.447,86.835 57.75,87.25 64.25,87.25 66.548,84.952 66.548,82.058 R9.1
NetR11_2: R11.2 U6.10 U6.13 | length 48.2
  Top Layer w0.4: v1(74.422,49.53) U6.13 ; U6.10 v1(78.232,53.848) ; v1(89.154,54.102) 89.154,62.23 92.202,65.278 94.488,65.278 95.758,66.548 95.758,71.628 94.25,73.136 R11.2
  Bottom Layer w0.4: v1(74.422,49.53) 74.422,49.784 78.232,53.594 v1(78.232,53.848) 79.094,52.986 82.45,52.986 83.312,53.848 88.559,53.848 v1@88.984,54.272 ; v1@88.9,54.272 88.9,53.848 v1(89.154,54.102)
NetR12_2: R12.2 U2.2 | length 3
  Top Layer w0.4: R12.2 82.407,87.249 U2.2
NetR15_2: R15.2 U5.17 | length 5.4
  Top Layer w0.2: R15.2 61.452,66.294 64.262,66.294 64.528,66.028 U5.17
NetR16_1: R16.1 U5.20 | length 3.2
  Top Layer w0.2: R16.1 63.77,64.754 63.996,64.528 U5.20
NetR17_1: R17.1 U5.21 | length 32.8
  Top Layer w0.2: R17.1 59.42,55.61 60.96,57.15 60.96,58.42 59.944,59.436 56.388,59.436 54.102,61.722 54.102,63.246 54.61,63.754 64.262,63.754 64.536,64.028 U5.21
NetR19_1: R19.1 U6.4 | length 88.6
  Top Layer w0.4: R19.1 33.782,87.63 32.258,86.106 32.258,80.772 34.544,78.486 45.974,78.486 v1(54.356,70.104) ; U6.4 76.962,45.466 78.232,44.196 v1(78.232,40.386)
  Bottom Layer w0.4: v1(54.356,70.104) 54.356,56.896 55.372,55.88 65.12,55.88 68.072,52.928 68.072,47.928 75.614,40.386 v1(78.232,40.386)
NetR23_1: R23.1 R24.2 U7.2 | length 20.9
  Top Layer w0.4: U7.2 64.135,53.467 v1(64.77,54.102) ; v1(66.802,43.434) 68.072,43.434 69.342,42.164 69.342,41.378 R24.2 R23.1@71.366,39.354
  Bottom Layer w0.4: v1(64.77,54.102) 66.802,52.07 v1(66.802,43.434)
NetR24_1: R24.1 R25.2 | length 2.6
  Top Layer w0.4: R25.2 R24.1
NetR25_1: R25.1 R26.2 | length 2.6
  Top Layer w0.4: R26.2 R25.1
NetR29_1: R29.1 U4.2 | length 4.7
  Top Layer w0.2: U4.2 97.79,81.28 99.568,81.28 100.568,80.28 R29.1
NetR30_2: R30.2 U7.1 | length 3.1
  Top Layer w0.4: U7.1 65.405,52.324 67.834,52.324 R30.2
NetR34_2: R34.2 R38.2 U6.5 | length 73.1
  Top Layer w0.4: R34.2 R38.2 37.354,65.294 41.402,69.342 47.752,69.342 52.07,65.024 52.07,61.214 55.753,57.531 v1(56.134,57.531) ; U6.5 78.232,45.466 79.502,44.196 79.502,42.672 v1(80.01,42.164)
  Bottom Layer w0.4: v1(56.134,57.531) 65.405,57.531 69.596,53.34 69.596,49.022 76.454,42.164 v1@79.404,42.164
NetR35_2: R35.2 R36.1 | length 2.6
  Top Layer w0.4: R36.1 36.806,47.752 R35.2
NetU3_4: U3.4 U4.3 | length 4.6
  Top Layer w0.2: U3.4 96.479,84.623 97.14,83.962 U4.3
NetU3_5: U3.5 U4.1 | length 5.1
  Top Layer w0.2: U4.1 98.44,83.962 99.101,84.623 U3.5
NetU5_19: U5.19 U6.6 | length 30.6
  Top Layer w0.2: U5.19 66.104,64.978 68.118,64.978 v1(68.326,64.77)
  Top Layer w0.4: U6.6 79.502,49.276 v1(79.756,49.53)
  Bottom Layer w0.4: v1(68.326,64.77) 68.326,60.706 72.39,56.642 72.39,49.784 74.168,48.006 78.232,48.006 v1(79.756,49.53)
NetU5_25: U5.25 U6.11 | length 17.6
  Top Layer w0.2: U5.25 67.354,56.09 69.088,54.356 76.2,54.356 76.962,53.594 U6.11
NetU5_27: U5.27 U6.3 | length 24.6
  Top Layer w0.2: U5.27 68.354,57.122 v1(69.088,56.388)
  Top Layer w0.4: U6.3 75.692,45.212 76.708,44.196 v1(76.708,43.688)
  Bottom Layer w0.4: v1(69.088,56.388) 71.12,54.356 71.12,49.276 v1(76.708,43.688)
NetU5_28: U5.28 U6.9 | length 18.1
  Top Layer w0.2: U5.28 68.854,58.4 72.136,55.118 79.248,55.118 79.502,54.864 U6.9
pads on no net: H1.2 H1.3 H1.4 H1.A J4.1 J4.2 J4.3 J4.4 J4.5 J4.6 J4.7 J4.8 U3.1 U3.8 U4.4 U5.2 U5.3 U5.4 U5.11 U5.13 U5.14 U5.15 U5.16 U5.22 U5.26 U5.38 U5.39 U5.40 U5.41 U5.42 U5.43 U5.45 U5.46 U7.7

## Polygon pours and split planes (outlines as drawn)
GND on Bottom Layer "Bottom Layer-No Net" (solid, remove dead copper, pour order 4): 26,84 31,89 114,89 114,64 93,64 93,47 114,47 114,21 31,21 26,26 26,84

## Silkscreen, mask and mechanical layers (free items; w line width, h text height)
Top Overlay:
  text "B+" at 108.966,81.534 h1.52
  text "B-" at 108.966,77.47 h1.52
  text "GM+" at 29.972,46.99 h1.52
  text "GM-" at 93.218,42.926 h1.52
  text "STM32-Geiger" at 89.408,35.56 h1.52
Mechanical 1:
  lines w0.254: 115,63 115,63 ; 115,63 115,63.75 115,72.5 115,90 30,90 25,85 25,25 30,20 115,20 115,37.5 115,46.25 115,48 96,48 94,48 94,49.5 94,63 115,63

## Text inside footprints (layer, text, board x,y; h text height)
LDA: Top Overlay "3" at 42.672,87.757 h1.27 r90; Top Overlay "4" at 40.132,87.757 h1.27 r90; Top Overlay "2" at 40.132,81.153 h1.27 r90; Top Overlay "1" at 42.672,81.661 h1.27 r90